# EAGLE board nano24rf-top (EAGLE 7.6.0)
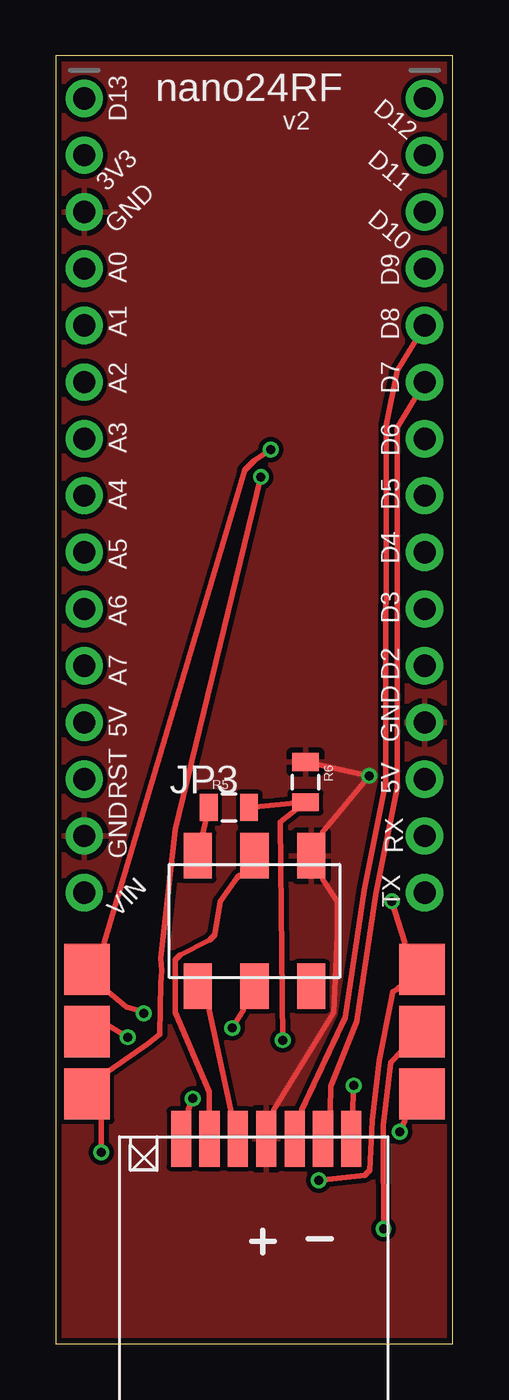
[diagram p0: board, top side]
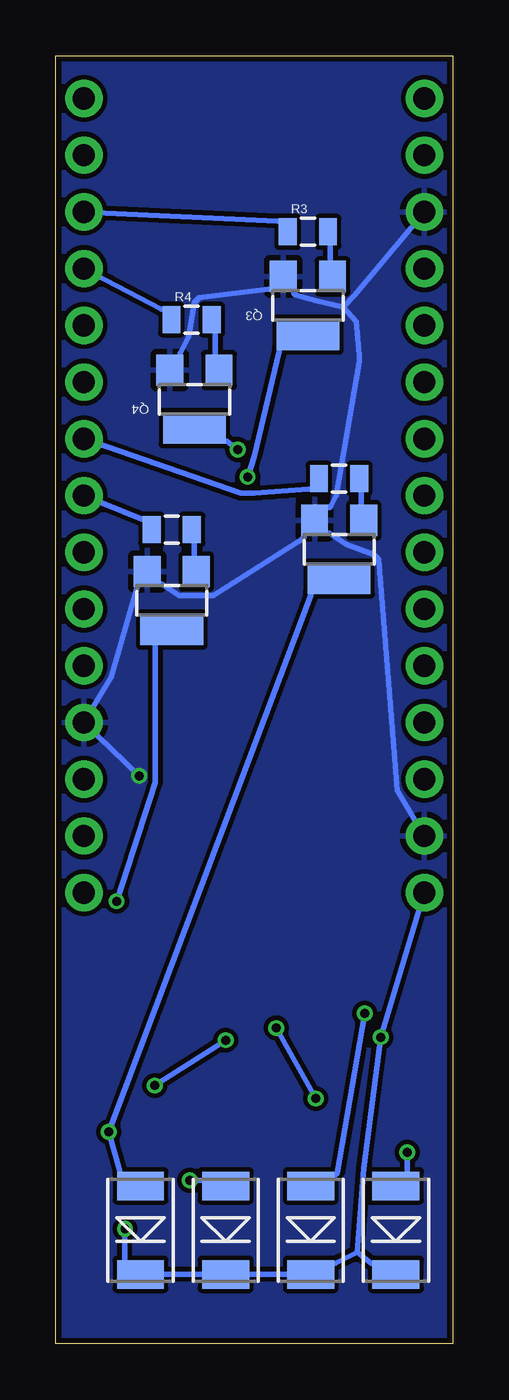
[diagram p1: board, bottom side, seen from below]

Size 17.76 x 57.66 mm. Coordinates in mm from the lower left corner, seen from the top.
Outline: 0,0 17.76,0 17.76,57.66 0,57.66 0,0
Copper layers (1*16): TOP 0.035mm / dielectric 1.5mm / BOTTOM 0.035mm
Design rules "Elecrow_2-layer_eagle_rule": minimum track width 6mil, minimum drill 12mil, track to track 6mil, track to pad 6mil, pad to pad 6mil, via to via 6mil, smd to smd 0mil, copper to edge 10mil, drill to drill 10mil, minimum pad ring 10mil, minimum via ring 6mil, stop-mask expansion 2mil, vias tented up to drill 100mil, thermal gap 10mil
Net classes: 0 default: width 0.203 mm, clearance 0.203 mm

## Footprints (pad centres in the part's own frame; a part is rotated, then mirrored left to right if it is on the bottom)
DO-214AC = smd 1.27 x 2.1: 1 -1.98,0; 2 1.98,0
1X15_ROUND_70 = drill 1 pad 1.676: 1 -17.78,0; 2 -15.24,0; 3 -12.7,0; 4 -10.16,0; 5 -7.62,0; 6 -5.08,0; 7 -2.54,0; 8 0,0; 9 2.54,0; 10 5.08,0; 11 7.62,0; 12 10.16,0; 13 12.7,0; 14 15.24,0; 15 17.78,0
2X03_SMT = smd 1.27 x 2.032: 1 -2.54,-2.921; 2 -2.54,2.921; 3 0,-2.921; 4 0,2.921; 5 2.54,-2.921; 6 2.54,2.921
SOT23-W = smd 1.2 x 1.4: 1 -1.1,-1.3; 2 1.1,-1.3 | smd 2.8 x 1.4: 3 0,1.3
0805 = smd 0.8 x 1.2: 1 -0.9,0; 2 0.9,0
FATPAD = smd 2.286 x 2.032: P$1 -2.794,0; P$2 0,0; P$3 2.794,0
SMD1,27-2,54 = smd 0.9 x 2.5: 1 1.63,0.1; 2 2.9,0.1; 3 4.17,0.1; 4 5.44,0.1; 5 6.71,0.1; 6 7.98,0.1; 7 9.25,0.1

## Placement (x,y rotation side)
D1  [DO-214AC]  13.97,5.08 90 bottom
D2  [DO-214AC]  10.16,5.08 90 bottom
D3  [DO-214AC]  2.54,5.08 90 bottom
D4  [DO-214AC]  6.35,5.08 90 bottom
JP1  [1X15_ROUND_70]  1.27,37.97 270 top
JP2  [1X15_ROUND_70]  16.51,37.97 270 top
JP3  [2X03_SMT]  8.89,18.92 0 top
Q1  [SOT23-W]  5.08,35.56 180 bottom
Q2  [SOT23-W]  12.57,33.27 180 bottom
Q3  [SOT23-W]  6.48,46.48 180 bottom
Q4  [SOT23-W]  11.56,42.29 180 bottom
R1  [0805]  5.08,38.73 0 bottom
R2  [0805]  12.57,36.45 0 bottom
R3  [0805]  6.48,49.78 0 bottom
R4  [0805]  11.68,45.85 0 bottom
R5  [0805]  7.75,24 0 top
R6  [0805]  11.18,25.15 270 top
U$6  1X3SMD  [FATPAD]  1.4,13.97 90 top
U$7  [SMD1,27-2,54]  14.86,9.27 180 top
U$8  1X3SMD  [FATPAD]  16.38,13.97 90 top

## Library data of the parts
D1-D4 = dp_devices
JP1 JP2 = microbuilder
JP3 = pinhead+
Q1-Q4 = adafruit
R1-R6 = ATTAMI-V0.00
U$6-U$8 = nanorf24

## Nets
3V3: JP1.2
5V: JP3.2 R5.1
CE: JP2.6 U$7.2
CSN: JP2.5 U$7.3
D3: JP2.10
D5: JP2.8 R2.1
D6: JP2.7 R1.1
D9: JP2.4 R4.1
D10: JP2.3 R3.1
FET01: D1.2 Q1.3 U$8.P$1
FET02: D2.2 Q2.3 U$8.P$3
FET03: D3.2 Q3.3 U$6.P$1
FET04: D4.2 Q4.3 U$6.P$3
GND: JP1.3 JP1.14 JP2.12 JP3.6 Q1.2 Q2.2 Q3.2 Q4.2 R6.1 U$7.4
MISO: JP3.1 U$7.5
MOSI: JP3.4 U$7.6
N$1: Q2.1 R2.2
N$2: Q1.1 R1.2
N$4: Q3.1 R3.2
N$5: Q4.1 R4.2
N$6: R5.2 R6.2 U$7.1
RST: JP3.5
SCK: JP3.3 U$7.7
SCL: JP1.9
SDA: JP1.8
VIN: D1.1 D2.1 D3.1 D4.1 JP1.15 U$6.P$2 U$8.P$2

## Tracks (layer width: path | path; a pad name or v marks a point on that pad's centre or on a via)
5V
  TOP 0.254: R5.1 JP3.2
CE
  TOP 0.254: U$7.2 12.28,10.29 12.28,10.42 12.28,10.47 12.3,11.51 13.46,14.44 14.31,20.11 15.27,24.91 15.29,41.02 JP2.6
CSN
  TOP 0.254: U$7.3 11.01,10.29 11.01,10.42 11.01,10.47 12.95,14.62 13.8,20.32 14.76,25.12 14.78,41.13 15.29,43.56 JP2.5
D5
  BOTTOM 0.254: R2.1 13.75,36.92 13.87,36.92 13.93,36.92 JP2.8
D6
  BOTTOM 0.254: JP2.7 9.48,38.08 8.87,38.08 6.43,38.26 6.38,38.26 6.25,38.26 R1.1
D9
  BOTTOM 0.254: R4.1 12.86,46.32 12.98,46.32 13.04,46.32 JP2.4
D10
  BOTTOM 0.254: R3.1 7.65,50.26 7.78,50.26 7.83,50.26 JP2.3
FET01  (via drill 0.4 pad 0.7)
  TOP 0.254: U$8.P$1 15.62,10.16 15.62,9.98 v15.39,9.48
  BOTTOM 0.254: Q1.3 6.35,33.69 6.35,33.51 v15.39,9.48 14.89,7.75 14.89,7.57 D1.2
FET02  (via drill 0.4 pad 0.7)
  TOP 0.254: v15.04,19.81 15.62,17.96 15.62,17.78 U$8.P$3 15.62,15.75 15.37,15.95 15.29,15.88 15.08,15.75 14.99,15.27 14.48,12.69 14.15,9.99 14.06,7.76 13.84,7.54 v11.76,7.32
  BOTTOM 0.254: Q2.3 13.3,31.4 13.3,25.12 v15.04,19.81 | D2.2 11.08,7.32 v11.76,7.32
FET03  (via drill 0.4 pad 0.7)
  TOP 0.254: v9.18,38.81 5.33,23.02 4.7,17.26 arc-15 4.7,16.13 4.66,13.85 4.11,13.42 2.34,12.19 2.16,12.19 U$6.P$1 2.04,10.16 v2.04,8.57
  BOTTOM 0.254: Q3.3 7.75,44.61 7.75,44.43 8.89,39.73 v9.18,38.81 | v2.04,8.57 2.04,7.57 D3.2
FET04  (via drill 0.4 pad 0.7)
  TOP 0.254: v3.93,14.79 3.7,14.91 3.14,15.09 2.34,15.75 2.16,15.75 U$6.P$3 2.16,17.78 2.16,17.96 8.45,39.11 8.87,39.54 v9.62,40.03
  BOTTOM 0.254: v3.93,14.79 5.17,7.64 5.25,7.57 5.43,7.57 D4.2 | Q4.3 10.28,40.42 10.1,40.42 v9.62,40.03
GND  (via drill 0.4 pad 0.7)
  TOP 0.254: U$7.4 9.74,10.29 9.74,10.47 12.45,14.83 12.6,18.29 12.6,19.81 11.94,20.77 11.94,20.95 JP3.6 11.94,22.73 11.94,22.91 v14.03,25.43 R6.1
  BOTTOM 0.254: JP1.14 2.49,24.77 3.3,35.12 3.52,35.34 4.74,35.78 5.53,36.29 5.71,36.29 Q1.2 | v14.03,25.43 JP2.12 15.29,29.85 14.15,33.82 14.15,34 Q2.2 13.2,34 13.02,34 12.23,33.49 10.71,33.49 6.73,36.03 6.65,36.11 6.65,36.29 Q1.2 | 4.9,46.41 6.13,46.7 7.03,46.95 7.1,47.03 7.1,47.21 Q3.2 8.05,47.21 8.23,47.21 11.34,46.83 11.56,46.6 11.8,45.09 12.18,44.34 12.18,44.16 Q4.2 | 4.9,46.41 4.4,46.92 JP1.3 | 4.9,46.41 4.32,45.77 4.19,44.26 4.19,43.94 5.2,37.98 5.45,37.51 5.53,37.43 5.71,37.43 Q1.2
  pour TOP: -0.25,57.78 0,0 17.78,-0.13 17.78,57.78
  pour BOTTOM: 0,57.66 0,-0.13 17.78,-0.13 17.78,57.66
MISO
  TOP 0.254: U$7.5 7.83,10.29 7.83,10.42 7.83,10.47 6.86,14.93 6.86,14.99 6.86,15.11 JP3.1
MOSI
  TOP 0.254: U$7.6 6.86,10.29 6.86,10.42 6.86,11.28 5.33,14.83 5.33,15.14 5.33,17.18 5.56,17.4 6.9,18.07 7.12,18.29 7.36,19.81 8.13,20.88 8.2,20.95 8.26,20.95 8.38,20.95 JP3.4
N$1
  BOTTOM 0.254: R2.2 11.57,35.98 11.57,35.85 11.57,35.27 11.57,35.15 Q2.1
N$2
  BOTTOM 0.254: R1.2 4.08,38.26 4.08,38.13 4.08,37.56 4.08,37.43 Q1.1
N$4
  BOTTOM 0.254: R3.2 5.48,49.31 5.48,49.18 5.48,48.48 5.48,48.35 Q3.1
N$5
  BOTTOM 0.254: R4.2 10.62,45.37 10.62,45.25 10.62,44.29 10.62,44.16 Q4.1
N$6  (via drill 0.4)
  TOP 0.254: R5.2 R6.2 10.03,23.37 v10.16,13.59 | v13.34,11.56 U$7.1
  BOTTOM 0.254: v10.16,13.59 v13.34,11.56
SCK  (via drill 0.4 pad 0.7)
  TOP 0.254: v7.89,14.13 8.38,14.93 8.38,14.99 8.38,15.11 JP3.3 | U$7.7 5.93,10.29 5.93,10.42 5.93,10.47 v6.13,10.97
  BOTTOM 0.254: v6.13,10.97 v7.89,14.13
VIN  (via drill 0.4 pad 0.7)
  TOP 0.254: v14.67,5.14 14.66,9.18 14.66,9.78 14.99,12.6 15.49,13.13 15.57,13.21 15.62,12.95 U$8.P$2 | U$6.P$2 2.16,14.36 v3.22,13.72
  BOTTOM 0.254: D3.1 3.46,3.61 3.64,3.61 4.28,4.09 | JP1.15 v3.22,13.72 3.97,7.85 4.28,4.09 | 4.28,4.09 5.25,3.61 5.43,3.61 D4.1 D2.1 D1.1 14.67,3.61 v14.67,5.14

## Text on the board
tPlace: nano24RF | D13 | v2 | D12 | 3V3 | D11 | GND | D10 | A0 | D9 | A1 | D8 | A2 | D7 | A3 | D6 | A4 | D5 | A5 | D4 | A6 | D3 | D2 | A7 | 5V | GND | 5V | RST | GND | RX | VIN | TX